# Altium PCB bai 1.PcbDoc
Units mil, origin at the board's own origin, x right, y up, seen from the top; angles counter-clockwise.
Board outline 6000 x 4000 mil, 2 copper layers (Top Layer, Bottom Layer); 40 components, 8 nets, 88 pads, 0 vias.
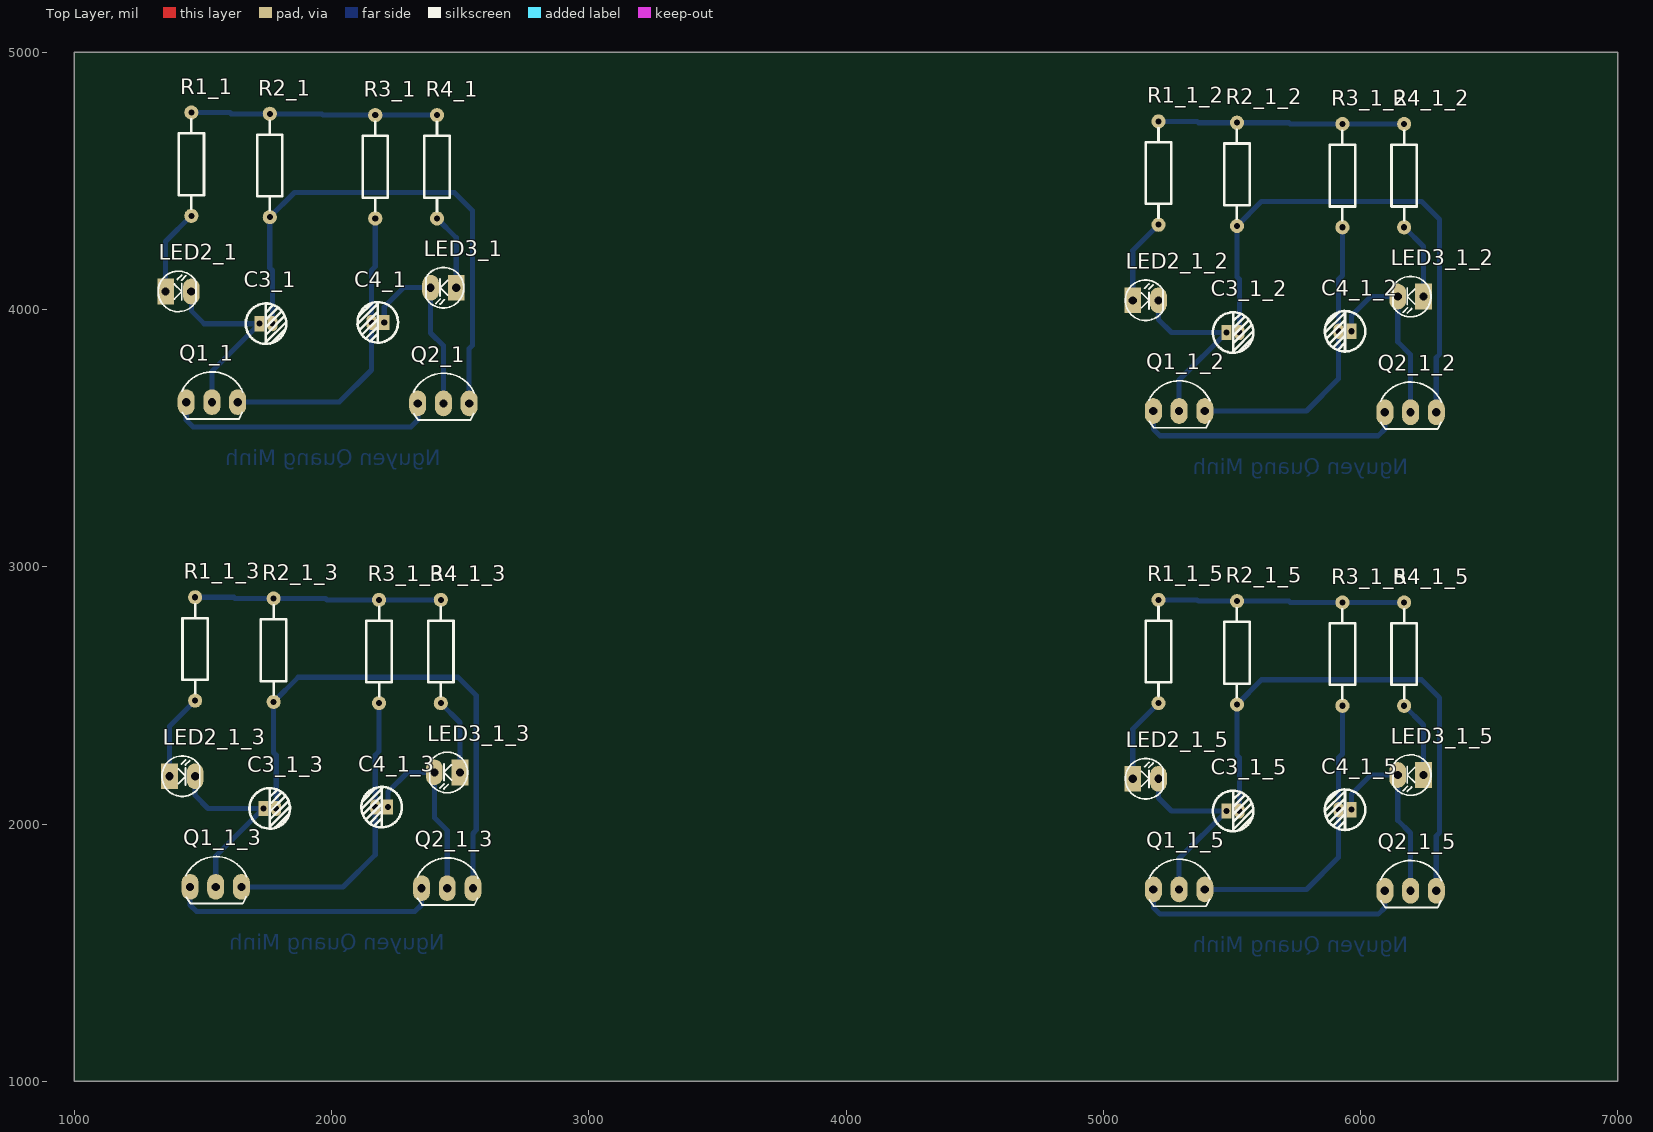
[diagram p0: Top Layer view]
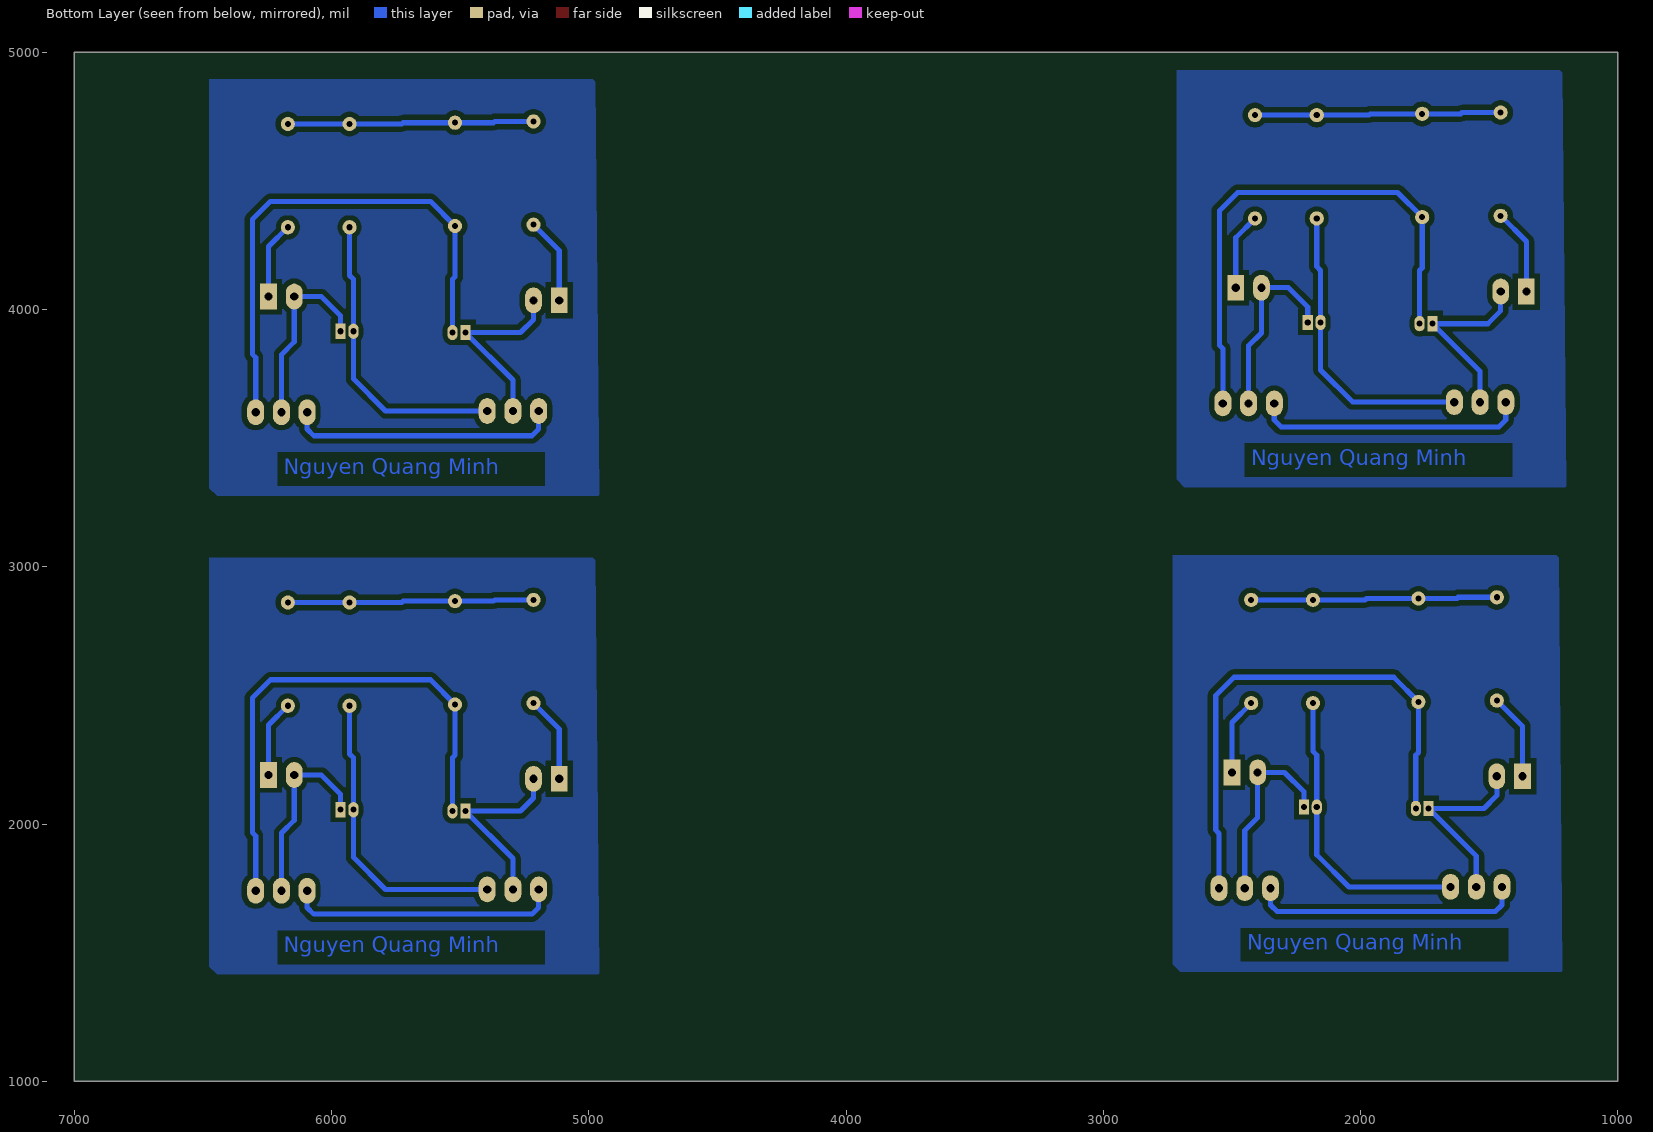
[diagram p1: Bottom Layer view, seen from below]

## Layer stack, top to bottom
Top Solder: solder mask 0.4, Solder Resist, Dk 3.5
Top Layer: signal copper 1.4
Dielectric 1: dielectric 12.6, FR-4, Dk 4.8
Bottom Layer: signal copper 1.4
Bottom Solder: solder mask 0.4, Solder Resist, Dk 3.5

## Board outline
1000,1000 7000,1000 7000,5000 1000,5000

## Design rules (kind name [scope] priority, off if disabled: settings)
Clearance [All] p1: gap=20 ignorepadtopadclearanceinfootprint=FALSE
PolygonConnect [All] p1: connectstyle=Relief reliefconductorwidth=10 reliefentries=4 polygonreliefangle="90 Angle" airgapwidth=10
RoomDefinition "bai 1" [InComponentClass('bai 1')] p1: confinementstyle=ConfineIn formatcopy=TRUE lockcomponents=FALSE outline 7045,1060 9405,1060 9405,1640 7045,1640
RoutingLayers [All] p1: top layer_v5=FALSE bottom layer_v5=TRUE
RoutingVias [All] p1: holewidth=28 width=50 viastyle="Through Hole" minholewidth=28 minwidth=50 maxholewidth=28 maxwidth=50
SolderMaskExpansion [All] p1: expansion=4 istentingtop=FALSE
Width [All] p1: maxlimit=30 minlimit=15 preferedwidth=20
29 further rules are at their usual default settings.

## Components (designator, comment, footprint, x,y, rotation, side; value= is the part's Value field where it differs from the comment)
C3_1 "10uF" "tu hoa 4mm" 1745,3945 r0 top (schematic designator C3)
C3_1_2 "10uF" "tu hoa 4mm" 5504.83,3910.56 r0 top (schematic designator C3)
C3_1_3 "10uF" "tu hoa 4mm" 1759.83,2060.56 r0 top (schematic designator C3)
C3_1_5 "10uF" "tu hoa 4mm" 5504.83,2050.56 r0 top (schematic designator C3)
C4_1 "10uF" "tu hoa 4mm" 2180,3950 r180 top (schematic designator C4)
C4_1_2 "10uF" "tu hoa 4mm" 5939.83,3915.56 r180 top (schematic designator C4)
C4_1_3 "10uF" "tu hoa 4mm" 2194.83,2065.56 r180 top (schematic designator C4)
C4_1_5 "10uF" "tu hoa 4mm" 5939.83,2055.56 r180 top (schematic designator C4)
LED2_1 "LED" LED-3 1355,4070 r0 top value="LED 3 ly Single Colour" (schematic designator LED2)
LED2_1_2 "LED" LED-3 5114.83,4035.56 r0 top value="LED 3 ly Single Colour" (schematic designator LED2)
LED2_1_3 "LED" LED-3 1369.83,2185.56 r0 top value="LED 3 ly Single Colour" (schematic designator LED2)
LED2_1_5 "LED" LED-3 5114.83,2175.56 r0 top value="LED 3 ly Single Colour" (schematic designator LED2)
LED3_1 "LED" LED-3 2485,4085 r180 top value="LED 3 ly Single Colour" (schematic designator LED3)
LED3_1_2 "LED" LED-3 6244.83,4050.56 r180 top value="LED 3 ly Single Colour" (schematic designator LED3)
LED3_1_3 "LED" LED-3 2499.83,2200.56 r180 top value="LED 3 ly Single Colour" (schematic designator LED3)
LED3_1_5 "LED" LED-3 6244.83,2190.56 r180 top value="LED 3 ly Single Colour" (schematic designator LED3)
Q1_1 "C1815" TO92 1535,3640 r0 top value=C9014 (schematic designator Q1)
Q1_1_2 "C1815" TO92 5294.83,3605.56 r0 top value=C9014 (schematic designator Q1)
Q1_1_3 "C1815" TO92 1549.83,1755.56 r0 top value=C9014 (schematic designator Q1)
Q1_1_5 "C1815" TO92 5294.83,1745.56 r0 top value=C9014 (schematic designator Q1)
Q2_1 "C1815" TO92 2435,3635 r0 top value=C9014 (schematic designator Q2)
Q2_1_2 "C1815" TO92 6194.83,3600.56 r0 top value=C9014 (schematic designator Q2)
Q2_1_3 "C1815" TO92 2449.83,1750.56 r0 top value=C9014 (schematic designator Q2)
Q2_1_5 "C1815" TO92 6194.83,1740.56 r0 top value=C9014 (schematic designator Q2)
R1_1 "1k" "tro vach 1/4w" 1455,4565 r90 top (schematic designator R1)
R1_1_2 "1k" "tro vach 1/4w" 5214.83,4530.56 r90 top (schematic designator R1)
R1_1_3 "1k" "tro vach 1/4w" 1469.83,2680.56 r90 top (schematic designator R1)
R1_1_5 "1k" "tro vach 1/4w" 5214.83,2670.56 r90 top (schematic designator R1)
R2_1 "47k" "tro vach 1/4w" 1760,4560 r90 top (schematic designator R2)
R2_1_2 "47k" "tro vach 1/4w" 5519.83,4525.56 r90 top (schematic designator R2)
R2_1_3 "47k" "tro vach 1/4w" 1774.83,2675.56 r90 top (schematic designator R2)
R2_1_5 "47k" "tro vach 1/4w" 5519.83,2665.56 r90 top (schematic designator R2)
R3_1 "47k" "tro vach 1/4w" 2170,4555 r90 top (schematic designator R3)
R3_1_2 "47k" "tro vach 1/4w" 5929.83,4520.56 r90 top (schematic designator R3)
R3_1_3 "47k" "tro vach 1/4w" 2184.83,2670.56 r90 top (schematic designator R3)
R3_1_5 "47k" "tro vach 1/4w" 5929.83,2660.56 r90 top (schematic designator R3)
R4_1 "1k" "tro vach 1/4w" 2410,4555 r90 top (schematic designator R4)
R4_1_2 "1k" "tro vach 1/4w" 6169.83,4520.56 r90 top (schematic designator R4)
R4_1_3 "1k" "tro vach 1/4w" 2424.83,2670.56 r90 top (schematic designator R4)
R4_1_5 "1k" "tro vach 1/4w" 6169.83,2660.56 r90 top (schematic designator R4)

## Footprints (in the part's own frame and the unit in brackets; to place one, negate y for a bottom-side part, rotate by r counter-clockwise, add the part's x,y. Pads: shape width x height; smd on the part's side, far side on the other; paste and mask are expansions set on the pad)
LED-3 [mil] "LED 2 PIN, 3ly Only colour"
  rect 65x100 hole 32: 1(0,0)
  oval 65x100 hole 32: 2(100,0)
  silkscreen extent -29,-78 118,79, body extent -25,-75 113,75, height 217
TO92 [mil] "TO-92"
  oval 66x100 hole 32: 1(-100,0) 2(0,0) 3(100,0)
  silkscreen extent -117,-65 120,118, body extent -109,-66 109,95, height 245
"tro vach 1/4w" [mm]
  round 1.4 hole 0.6: 1(-5.1,0) 2(5.1,0)
  silkscreen extent -4.39,-1.25 4.42,1.25, body extent -5.38,-1.2 5.38,1.2, height 2.41
"tu hoa 4mm" [mm]
  rect 1x1.5 hole 0.6: 1(-0.635,0)
  oval 1x1.5 hole 0.6: 2(0.635,0)
  silkscreen extent -2,-2 2.01,2.01, body extent -2.47,-2.47 2.58,2.58, height 14.81

## Part data
C3_1 C3_1_2 C3_1_3 C3_1_5 C4_1 C4_1_2 C4_1_3 C4_1_5: library part "Tu Hoa 10uF 16V 4x7", "Cắm", Chung_Loai=Cắm, Don_Vi=Con, Ma_Hang=MH006855, So_Chan=2, Ten_Linh_Kien="Tụ Hóa 10uF 16V"
LED2_1 LED2_1_2 LED2_1_3 LED2_1_5 LED3_1 LED3_1_2 LED3_1_3 LED3_1_5: "LED Single colour Green and Red"
Q1_1 Q1_1_2 Q1_1_3 Q1_1_5 Q2_1 Q2_1_2 Q2_1_3 Q2_1_5: "NPN transistor"
R1_1 R1_1_2 R1_1_3 R1_1_5 R2_1 R2_1_2 R2_1_3 R2_1_5 R3_1 R3_1_2 R3_1_3 R3_1_5 R4_1 R4_1_2 R4_1_3 R4_1_5: library part "Tro Vach 1/4W 5% 2k", "Cắm", Chung_Loai=Cắm, Don_Vi=Con, Ma_Hang=MH007305, So_Chan=2, Ten_Linh_Kien="Trở Vạch 1/4w 5% 2k"

## Nets (pads, with @x,y where several pads share a name; then routed paths per layer and width w, separated by ;. In a path a pad name is that pad's centre, name@x,y a point inside that pad or via, vN(x,y) a via of type N, cw(c..) or ccw(c..) an arc to the next point about the centre after c; other vN are vias at no path point)
GND: 
NetC3_1: 
NetC3_2: 
NetC4_1: 
NetC4_2: 
NetLED2_1: 
NetLED3_1: 
NetR1_2: 
pads on no net: C3_1.1 C3_1.2 C3_1_2.1 C3_1_2.2 C3_1_3.1 C3_1_3.2 C3_1_5.1 C3_1_5.2 C4_1.1 C4_1.2 C4_1_2.1 C4_1_2.2 C4_1_3.1 C4_1_3.2 C4_1_5.1 C4_1_5.2 LED2_1.1 LED2_1.2 LED2_1_2.1 LED2_1_2.2 LED2_1_3.1 LED2_1_3.2 LED2_1_5.1 LED2_1_5.2 LED3_1.1 LED3_1.2 LED3_1_2.1 LED3_1_2.2 LED3_1_3.1 LED3_1_3.2 LED3_1_5.1 LED3_1_5.2 Q1_1.1 Q1_1.2 Q1_1.3 Q1_1_2.1 Q1_1_2.2 Q1_1_2.3 Q1_1_3.1 Q1_1_3.2 Q1_1_3.3 Q1_1_5.1 Q1_1_5.2 Q1_1_5.3 Q2_1.1 Q2_1.2 Q2_1.3 Q2_1_2.1 Q2_1_2.2 Q2_1_2.3 Q2_1_3.1 Q2_1_3.2 Q2_1_3.3 Q2_1_5.1 Q2_1_5.2 Q2_1_5.3 R1_1.1 R1_1.2 R1_1_2.1 R1_1_2.2 R1_1_3.1 R1_1_3.2 R1_1_5.1 R1_1_5.2 R2_1.1 R2_1.2 R2_1_2.1 R2_1_2.2 R2_1_3.1 R2_1_3.2 R2_1_5.1 R2_1_5.2 R3_1.1 R3_1.2 R3_1_2.1 R3_1_2.2 R3_1_3.1 R3_1_3.2 R3_1_5.1 R3_1_5.2 R4_1.1 R4_1.2 R4_1_2.1 R4_1_2.2 R4_1_3.1 R4_1_3.2 R4_1_5.1 R4_1_5.2
copper on no net: | length 29330.9
  Bottom Layer w20: 1355,4070 1355,4264.21 1455,4364.21 ; 1369.83,2185.56 1369.83,2379.77 1469.83,2479.77 ; 1435,3640 1435,3570 1461,3544 2309,3544 2335,3570 2335,3635 ; 1449.83,1755.56 1449.83,1685.56 1475.83,1659.56 2323.83,1659.56 2349.83,1685.56 2349.83,1750.56 ; 1455,4070 1455,3995 1505,3945 1720,3945 1535,3760 1535,3640 ; 1455,4765.79 1605,4765.79 1610,4760.79 1760,4760.79 1962,4760.79 1967,4755.79 2170,4755.79 2410,4755.79 ; 1469.83,2185.56 1469.83,2110.56 1519.83,2060.56 1734.83,2060.56 1549.83,1875.56 1549.83,1755.56 ; 1469.83,2881.34 1619.83,2881.34 1624.83,2876.34 1774.83,2876.34 1976.83,2876.34 1981.83,2871.34 2184.83,2871.34 2424.83,2871.34 ; 1635,3640 2030,3640 2155,3765 2155,3950 2155,4152 2170,4167 2170,4354.21 ; 1649.83,1755.56 2044.83,1755.56 2169.83,1880.56 2169.83,2065.56 2169.83,2267.56 2184.83,2282.56 2184.83,2469.77 ; 1770,3945 1770,4152 1760,4162 1760,4359.21 1855.79,4455 2477,4455 2548,4384 2548,3861 2535,3848 2535,3635 ; 1784.83,2060.56 1784.83,2267.56 1774.83,2277.56 1774.83,2474.77 1870.62,2570.56 2491.83,2570.56 2562.83,2499.56 2562.83,1976.56 2549.83,1963.56 2549.83,1750.56 ; 2205,3950 2205,4010 2280,4085 2385,4085 2385,3909 2435,3859 2435,3635 ; 2219.83,2065.56 2219.83,2125.56 2294.83,2200.56 2399.83,2200.56 2399.83,2024.56 2449.83,1974.56 2449.83,1750.56 ; 2410,4354.21 2485,4279.21 2485,4085 ; 2424.83,2469.77 2499.83,2394.77 2499.83,2200.56 ; 5114.83,2175.56 5114.83,2369.77 5214.83,2469.77 ; 5114.83,4035.56 5114.83,4229.77 5214.83,4329.77 ; 5194.83,1745.56 5194.83,1675.56 5220.83,1649.56 6068.83,1649.56 6094.83,1675.56 6094.83,1740.56 ; 5194.83,3605.56 5194.83,3535.56 5220.83,3509.56 6068.83,3509.56 6094.83,3535.56 6094.83,3600.56 ; 5214.83,2175.56 5214.83,2100.56 5264.83,2050.56 5479.83,2050.56 5294.83,1865.56 5294.83,1745.56 ; 5214.83,2871.34 5364.83,2871.34 5369.83,2866.34 5519.83,2866.34 5721.83,2866.34 5726.83,2861.34 5929.83,2861.34 6169.83,2861.34 ; 5214.83,4035.56 5214.83,3960.56 5264.83,3910.56 5479.83,3910.56 5294.83,3725.56 5294.83,3605.56 ; 5214.83,4731.34 5364.83,4731.34 5369.83,4726.34 5519.83,4726.34 5721.83,4726.34 5726.83,4721.34 5929.83,4721.34 6169.83,4721.34 ; 5394.83,1745.56 5789.83,1745.56 5914.83,1870.56 5914.83,2055.56 5914.83,2257.56 5929.83,2272.56 5929.83,2459.77 ; 5394.83,3605.56 5789.83,3605.56 5914.83,3730.56 5914.83,3915.56 5914.83,4117.56 5929.83,4132.56 5929.83,4319.77 ; 5529.83,2050.56 5529.83,2257.56 5519.83,2267.56 5519.83,2464.77 5615.62,2560.56 6236.83,2560.56 6307.83,2489.56 6307.83,1966.56 6294.83,1953.56 6294.83,1740.56 ; 5529.83,3910.56 5529.83,4117.56 5519.83,4127.56 5519.83,4324.77 5615.62,4420.56 6236.83,4420.56 6307.83,4349.56 6307.83,3826.56 6294.83,3813.56 6294.83,3600.56 ; 5964.83,2055.56 5964.83,2115.56 6039.83,2190.56 6144.83,2190.56 6144.83,2014.56 6194.83,1964.56 6194.83,1740.56 ; 5964.83,3915.56 5964.83,3975.56 6039.83,4050.56 6144.83,4050.56 6144.83,3874.56 6194.83,3824.56 6194.83,3600.56 ; 6169.83,2459.77 6244.83,2384.77 6244.83,2190.56 ; 6169.83,4319.77 6244.83,4244.77 6244.83,4050.56

## Polygon pours and split planes (outlines as drawn)
no net on Bottom Layer "NONET_L02_P007" (solid, pour order 7): 4959.83,1415.56 6444.83,1415.56 6474.83,1445.56 6474.83,3035.56 4984.83,3035.56 4974.83,3025.56
no net on Bottom Layer "NONET_L02_P005" (solid, pour order 5): 1214.83,1425.56 2699.83,1425.56 2729.83,1455.56 2729.83,3045.56 1239.83,3045.56 1229.83,3035.56
no net on Bottom Layer "NONET_L02_P004" (solid, pour order 4): 4959.83,3275.56 6444.83,3275.56 6474.83,3305.56 6474.83,4895.56 4984.83,4895.56 4974.83,4885.56
no net on Bottom Layer "NONET_L02_P002" (solid, pour order 2): 1200,3310 2685,3310 2715,3340 2715,4930 1225,4930 1215,4920

## Other copper
Bottom Layer:
  text "Nguyen Quang Minh" at 2425,3394.99 h60
  text "Nguyen Quang Minh" at 6184.83,3360.55 h60
  text "Nguyen Quang Minh" at 2439.83,1510.55 h60
  text "Nguyen Quang Minh" at 6184.83,1500.55 h60